# EAGLE board SunnyBuddy-Panel-v10 (EAGLE 6.5.0), part 1 of 2
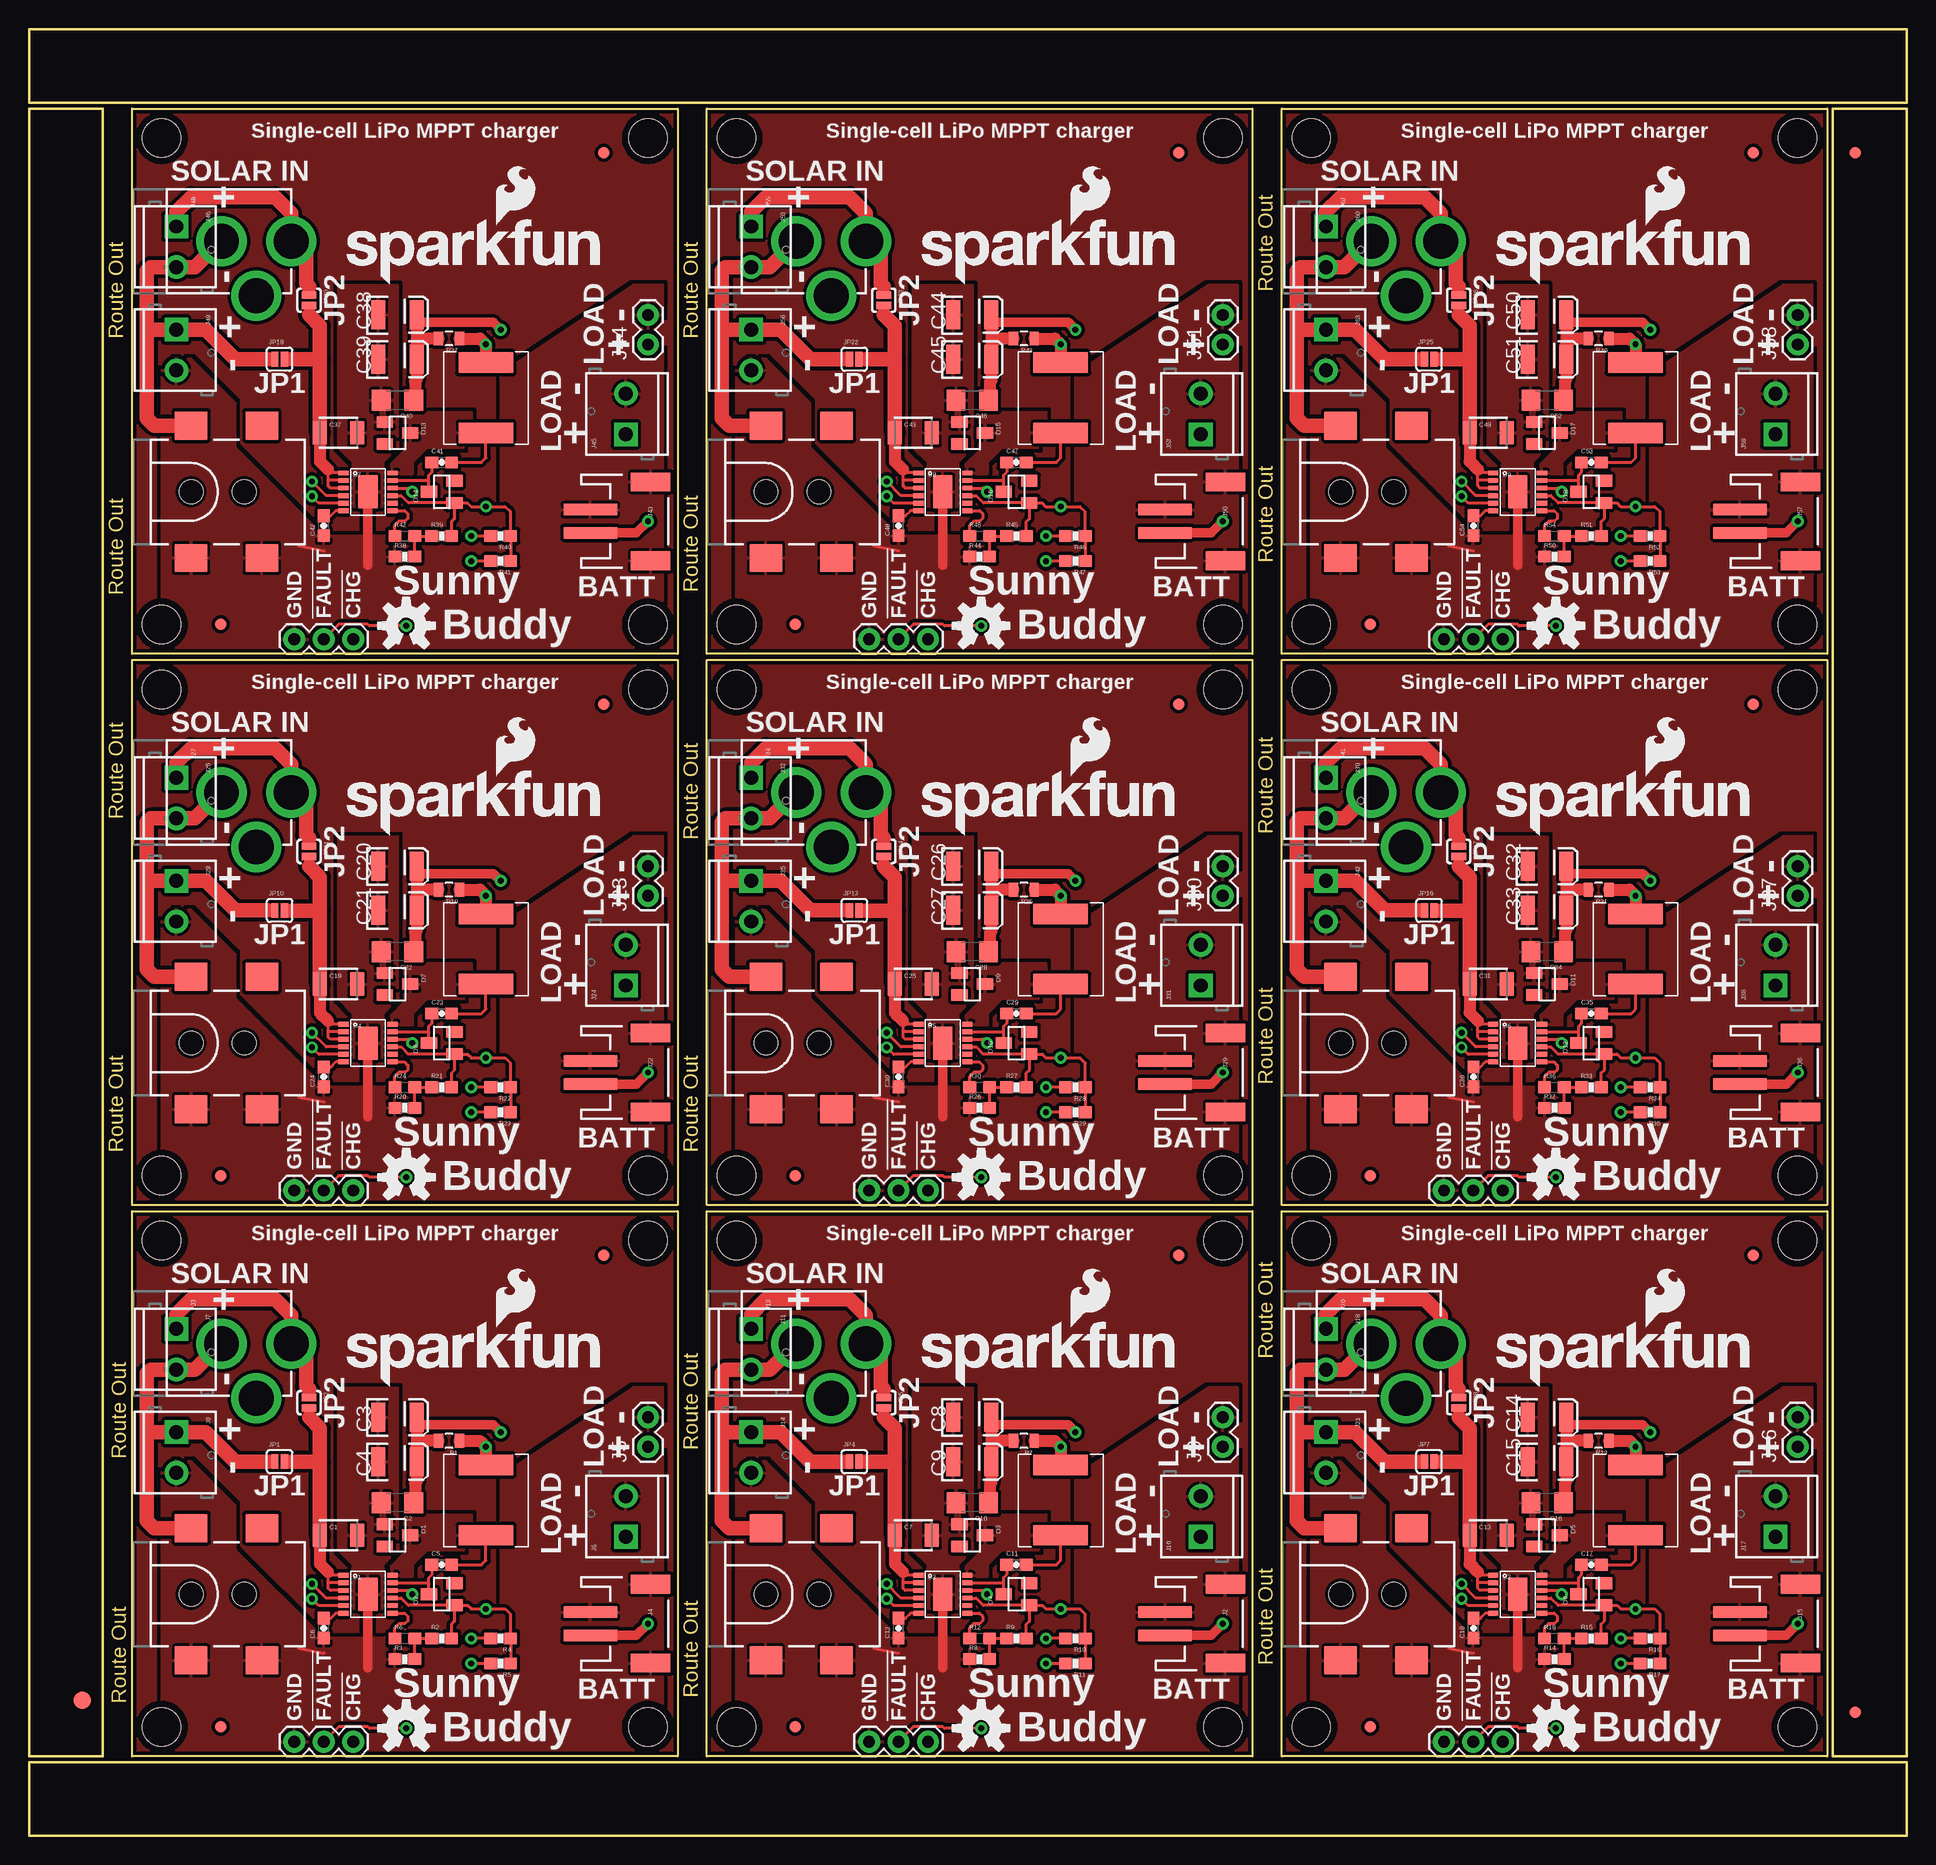
[diagram p0: board, top side]
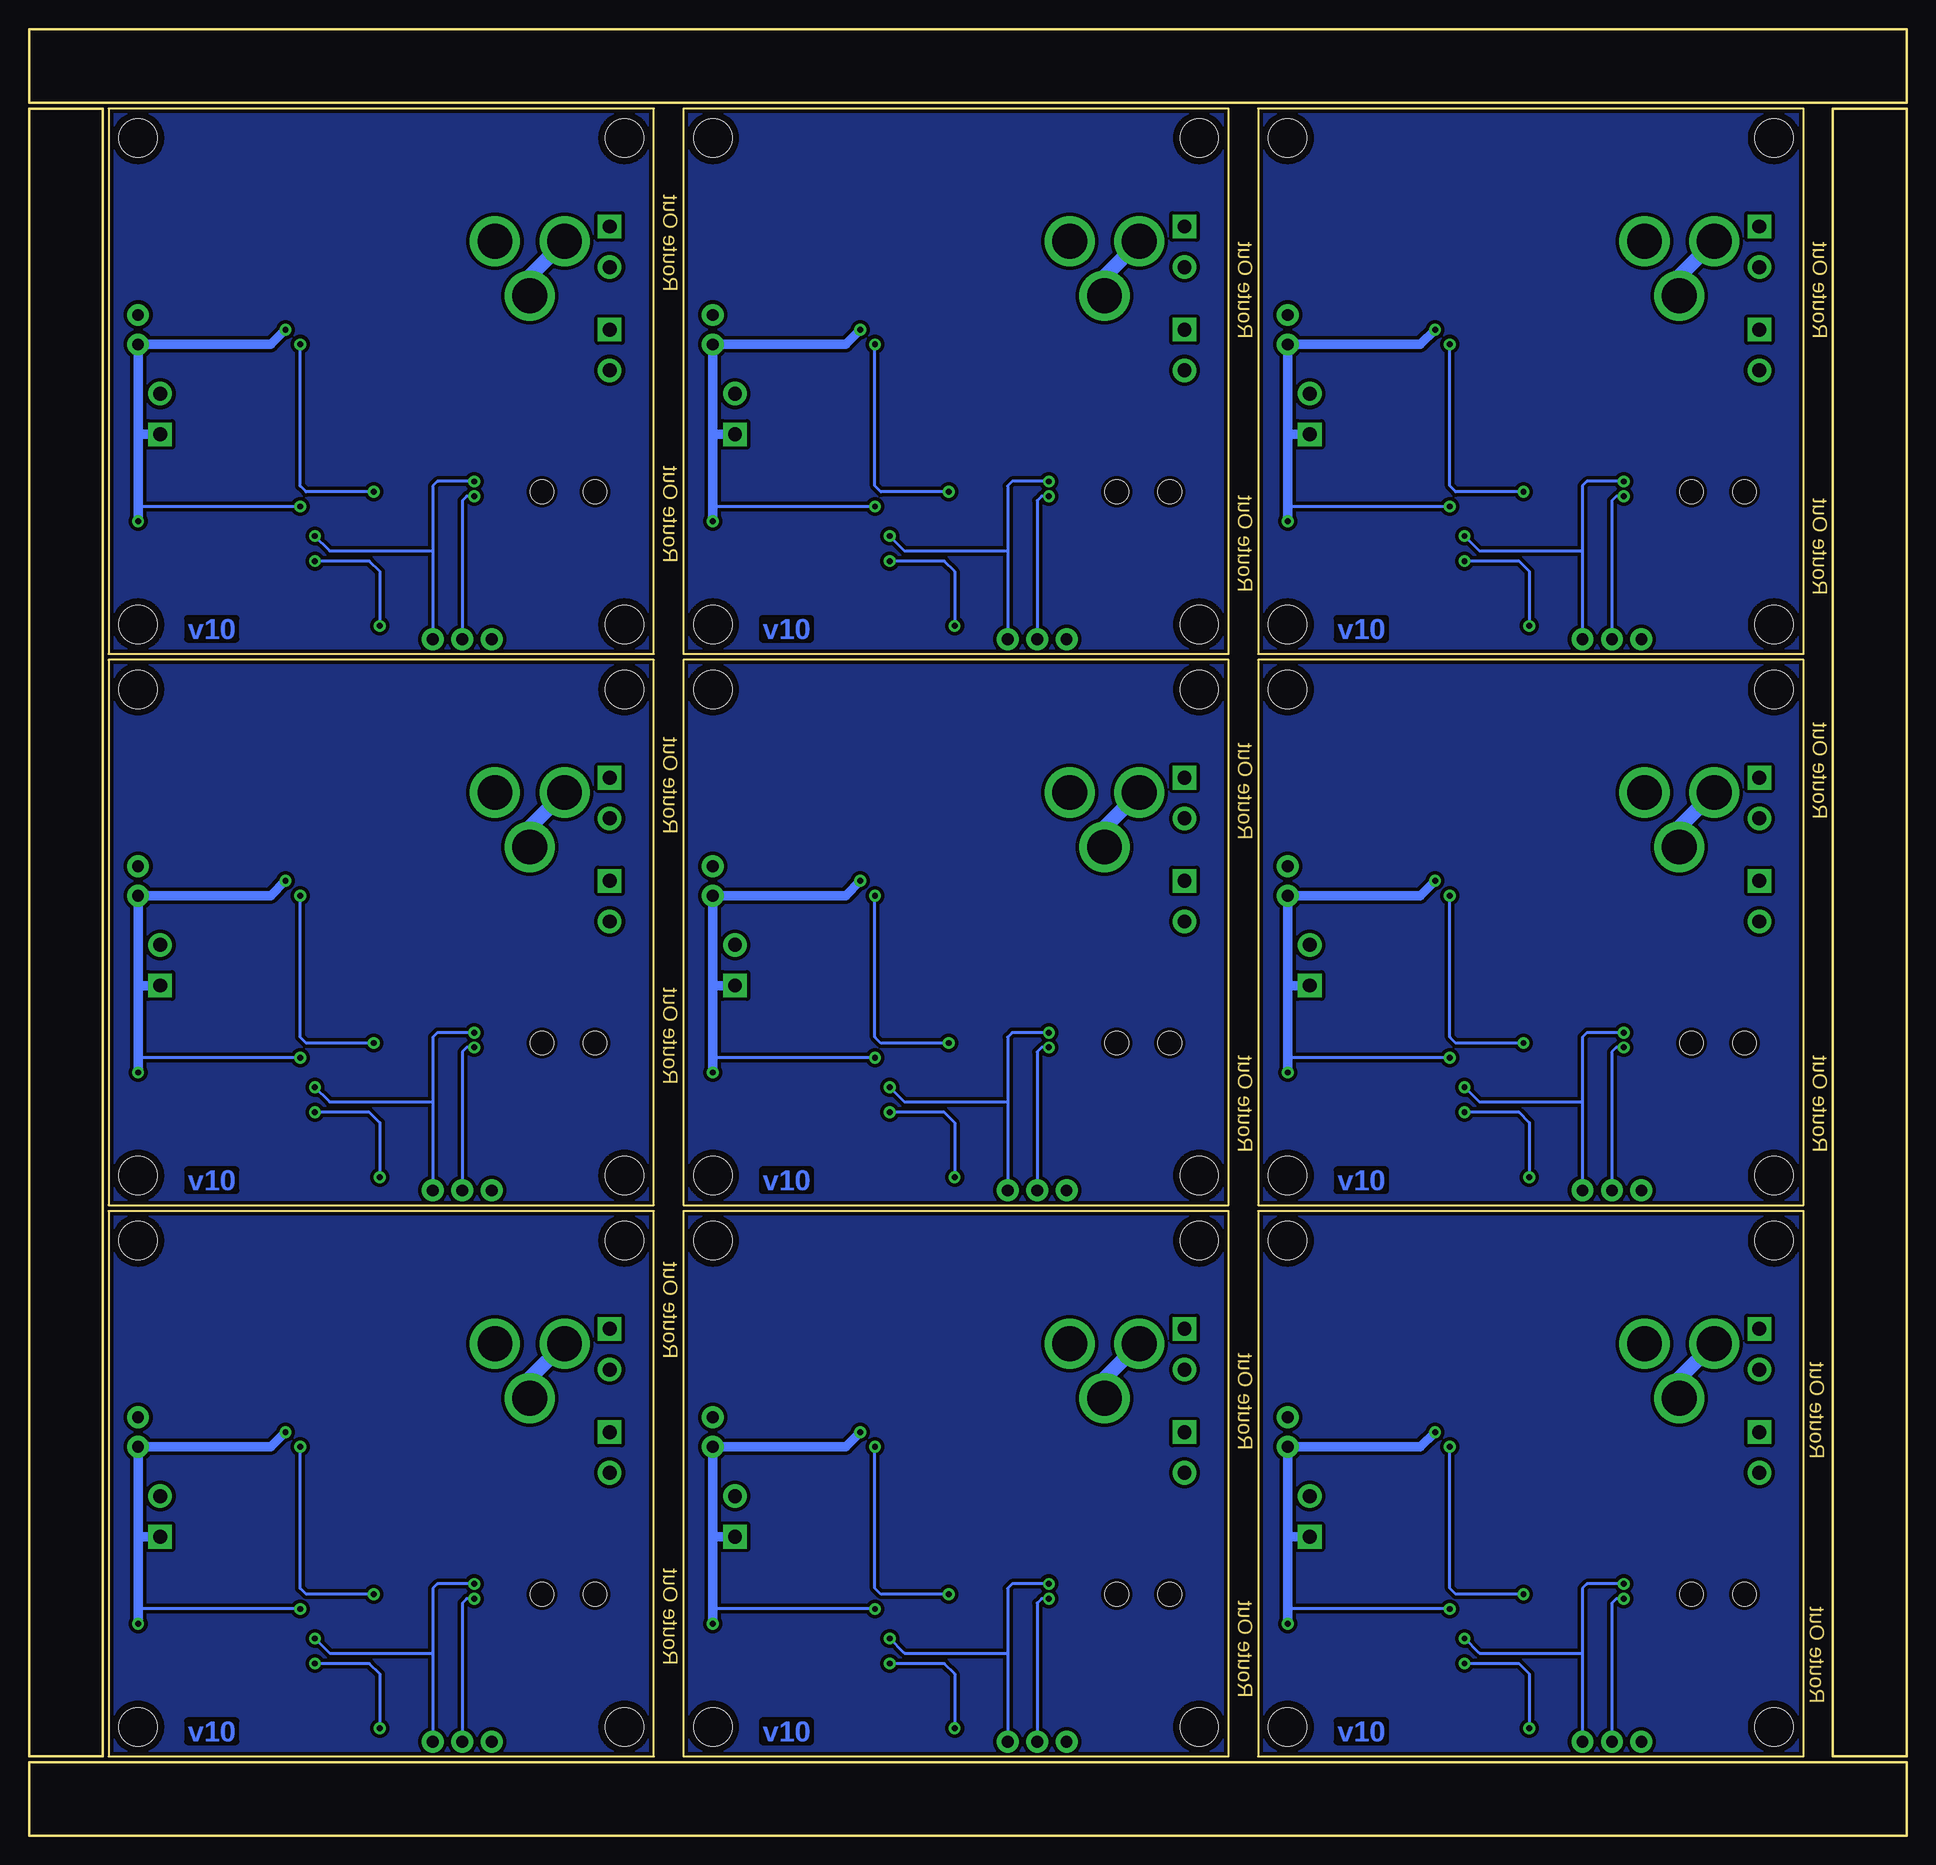
[diagram p1: board, bottom side, seen from below]

Size 161.8 x 155.7 mm. Coordinates in mm from the lower left corner, seen from the top.
Outline: 8.89,53.85 55.88,53.85 55.88,6.86 8.89,6.86 8.89,53.85
Outline: 58.42,53.85 105.41,53.85 105.41,6.86 58.42,6.86 58.42,53.85
Outline: 107.95,53.85 154.94,53.85 154.94,6.86 107.95,6.86 107.95,53.85
Outline: 8.89,101.35 55.88,101.35 55.88,54.36 8.89,54.36 8.89,101.35
Outline: 58.42,101.35 105.41,101.35 105.41,54.36 58.42,54.36 58.42,101.35
Outline: 107.95,101.35 154.94,101.35 154.94,54.36 107.95,54.36 107.95,101.35
Outline: 8.89,148.84 55.88,148.84 55.88,101.85 8.89,101.85 8.89,148.84
Outline: 58.42,148.84 105.41,148.84 105.41,101.85 58.42,101.85 58.42,148.84
Outline: 107.95,148.84 154.94,148.84 154.94,101.85 107.95,101.85 107.95,148.84
Outline: 6.35,6.86 6.35,148.84 0,148.84 0,6.86 6.35,6.86
Outline: 0,155.7 0,149.35 161.8,149.35 161.8,155.7 0,155.7
Outline: 155.45,148.84 155.45,6.86 161.8,6.86 161.8,148.84 155.45,148.84
Outline: 161.8,0 161.8,6.35 0,6.35 0,0 161.8,0
Copper layers (1*16): Top 0.035mm / dielectric 1.5mm / Bottom 0.035mm
Design rules "Sparkfun": minimum track width 8mil, minimum drill 20mil, track to track 8mil, track to pad 8mil, pad to pad 8mil, via to via 8mil, smd to smd 8mil, copper to edge 8mil, drill to drill 8mil, minimum pad ring 12mil, minimum via ring 10mil, stop-mask expansion 4mil, vias tented up to drill 20mil, thermal gap 10mil

## Footprints (pad centres in the part's own frame; a part is rotated, then mirrored left to right if it is on the bottom)
1210 = smd 1.2 x 2: 1 -1.6,0; 2 1.6,0
1206 = smd 1.6 x 1.8: 1 -1.4,0; 2 1.4,0
EIA3528 = smd 1.2 x 2.5: A 1.65,0; C -1.65,0
0603-CAP = smd 1.1 x 1: 1 -0.85,0; 2 0.85,0
SOT23 = smd 1 x 1.4: 1 -0.95,-1.1; 2 0.95,-1.1; 3 0,1.1
FIDUCIAL-1.5X3 = smd 1.5 x 1.5: 1 0,0
FIDUCIAL-1X2 = smd 1 x 1: 1 0,0
POWER_JACK_SMD = smd 2.8 x 2.4: GND 0,-5.7; P$4 6.1,-5.7; VIN0 0,5.7; VIN1 6.1,5.7 | hole 2.032: 0,0; 4.572,0
JST-2-SMD = smd 1 x 4.6: 1 -1,-3.7; 2 1,-3.7 | smd 1.6 x 3.4: NC1 -3.4,1.5; NC2 3.4,1.5
POWER_JACK_PTH = drill 2.997 pad 4.318: GND 0,7.7; GNDBREAK 4.7,10.7; PWR 0,13.7
1X02 = drill 1.016 pad 1.88: 1 0,0; 2 2.54,0
SCREWTERMINAL-3.5MM-2 = drill 1.2 pad 2.032 square: 1 0,0 | drill 1.2 pad 2.032: 2 3.5,0
SJ_2S = smd 0.635 x 1.27: 1 -0.412,0; 2 0.412,0
SJ_2S-NO = smd 0.635 x 1.27: 1 -0.45,0; 2 0.45,0
1X03 = drill 1.016 pad 1.88: 1 0,0; 2 2.54,0; 3 5.08,0
CR75 = smd 1.75 x 4.7: P$1 0,0; P$2 6.05,0
0805 = smd 0.8 x 1.2: 1 -0.9,0; 2 0.9,0
0603-RES = smd 1.1 x 1: 1 -0.85,0; 2 0.85,0
0603 = smd 1.1 x 1: 1 -0.85,0; 2 0.85,0
STAND-OFF = hole 3.302: 0,0
MSOP-12_GND = smd 0.889 x 0.42: 1 -2.1,1.625; 2 -2.1,0.975; 3 -2.1,0.325; 4 -2.1,-0.325; 5 -2.1,-0.975; 6 -2.1,-1.625; 7 2.1,-1.625; 8 2.1,-0.975; 9 2.1,-0.325; 10 2.1,0.325; 11 2.1,0.975; 12 2.1,1.625 | smd 1.651 x 2.845: 13 0,0

## Placement (x,y rotation side)
C1  10uF  [1210]  26.67,25.91 0 top
C2  10uF  [1206]  31.75,28.7 180 top
C3  47uF  [EIA3528]  31.75,36.07 0 top
C4  47uF  [EIA3528]  31.75,32.26 0 top
C5  1.0uF  [0603-CAP]  35.56,23.37 0 top
C6  1.0uF  [0603-CAP]  25.4,17.91 90 top
C7  10uF  [1210]  76.2,25.91 0 top
C8  47uF  [EIA3528]  81.28,36.07 0 top
C9  47uF  [EIA3528]  81.28,32.26 0 top
C10  10uF  [1206]  81.28,28.7 180 top
C11  1.0uF  [0603-CAP]  85.09,23.37 0 top
C12  1.0uF  [0603-CAP]  74.93,17.91 90 top
C13  10uF  [1210]  125.73,25.91 0 top
C14  47uF  [EIA3528]  130.81,36.07 0 top
C15  47uF  [EIA3528]  130.81,32.26 0 top
C16  10uF  [1206]  130.81,28.7 180 top
C17  1.0uF  [0603-CAP]  134.62,23.37 0 top
C18  1.0uF  [0603-CAP]  124.46,17.91 90 top
C19  10uF  [1210]  26.67,73.41 0 top
C20  47uF  [EIA3528]  31.75,83.57 0 top
C21  47uF  [EIA3528]  31.75,79.76 0 top
C22  10uF  [1206]  31.75,76.2 180 top
C23  1.0uF  [0603-CAP]  35.56,70.87 0 top
C24  1.0uF  [0603-CAP]  25.4,65.41 90 top
C25  10uF  [1210]  76.2,73.41 0 top
C26  47uF  [EIA3528]  81.28,83.57 0 top
C27  47uF  [EIA3528]  81.28,79.76 0 top
C28  10uF  [1206]  81.28,76.2 180 top
C29  1.0uF  [0603-CAP]  85.09,70.87 0 top
C30  1.0uF  [0603-CAP]  74.93,65.41 90 top
C31  10uF  [1210]  125.73,73.41 0 top
C32  47uF  [EIA3528]  130.81,83.57 0 top
C33  47uF  [EIA3528]  130.81,79.76 0 top
C34  10uF  [1206]  130.81,76.2 180 top
C35  1.0uF  [0603-CAP]  134.62,70.87 0 top
C36  1.0uF  [0603-CAP]  124.46,65.41 90 top
C37  10uF  [1210]  26.67,120.9 0 top
C38  47uF  [EIA3528]  31.75,131.06 0 top
C39  47uF  [EIA3528]  31.75,127.25 0 top
C40  10uF  [1206]  31.75,123.7 180 top
C41  1.0uF  [0603-CAP]  35.56,118.36 0 top
C42  1.0uF  [0603-CAP]  25.4,112.9 90 top
C43  10uF  [1210]  76.2,120.9 0 top
C44  47uF  [EIA3528]  81.28,131.06 0 top
C45  47uF  [EIA3528]  81.28,127.25 0 top
C46  10uF  [1206]  81.28,123.7 180 top
C47  1.0uF  [0603-CAP]  85.09,118.36 0 top
C48  1.0uF  [0603-CAP]  74.93,112.9 90 top
C49  10uF  [1210]  125.73,120.9 0 top
C50  47uF  [EIA3528]  130.81,131.06 0 top
C51  47uF  [EIA3528]  130.81,127.25 0 top
C52  10uF  [1206]  130.81,123.7 180 top
C53  1.0uF  [0603-CAP]  134.62,118.36 0 top
C54  1.0uF  [0603-CAP]  124.46,112.9 90 top
D1  ZLLS500  [SOT23]  31.75,25.91 270 top
D2  ZLLS500  [SOT23]  35.56,20.83 90 top
D3  ZLLS500  [SOT23]  81.28,25.91 270 top
D4  ZLLS500  [SOT23]  85.09,20.83 90 top
D5  ZLLS500  [SOT23]  130.81,25.91 270 top
D6  ZLLS500  [SOT23]  134.62,20.83 90 top
D7  ZLLS500  [SOT23]  31.75,73.41 270 top
D8  ZLLS500  [SOT23]  35.56,68.33 90 top
D9  ZLLS500  [SOT23]  81.28,73.41 270 top
D10  ZLLS500  [SOT23]  85.09,68.33 90 top
D11  ZLLS500  [SOT23]  130.81,73.41 270 top
D12  ZLLS500  [SOT23]  134.62,68.33 90 top
D13  ZLLS500  [SOT23]  31.75,120.9 270 top
D14  ZLLS500  [SOT23]  35.56,115.82 90 top
D15  ZLLS500  [SOT23]  81.28,120.9 270 top
D16  ZLLS500  [SOT23]  85.09,115.82 90 top
D17  ZLLS500  [SOT23]  130.81,120.9 270 top
D18  ZLLS500  [SOT23]  134.62,115.82 90 top
E$1  [FIDUCIAL-1.5X3]  4.57,11.68 0 top
E$5  [FIDUCIAL-1X2]  157.35,145.03 180 top
E$7  [FIDUCIAL-1X2]  157.35,10.67 0 top
FID1  FIDUCIAL1X2  [FIDUCIAL-1X2]  16.51,9.4 0 top
FID2  FIDUCIAL1X2  [FIDUCIAL-1X2]  49.53,50.04 0 top
FID3  FIDUCIAL1X2  [FIDUCIAL-1X2]  66.04,9.4 0 top
FID4  FIDUCIAL1X2  [FIDUCIAL-1X2]  99.06,50.04 0 top
FID5  FIDUCIAL1X2  [FIDUCIAL-1X2]  115.57,9.4 0 top
FID6  FIDUCIAL1X2  [FIDUCIAL-1X2]  148.59,50.04 0 top
FID7  FIDUCIAL1X2  [FIDUCIAL-1X2]  16.51,56.9 0 top
FID8  FIDUCIAL1X2  [FIDUCIAL-1X2]  49.53,97.54 0 top
FID9  FIDUCIAL1X2  [FIDUCIAL-1X2]  66.04,56.9 0 top
FID10  FIDUCIAL1X2  [FIDUCIAL-1X2]  99.06,97.54 0 top
FID11  FIDUCIAL1X2  [FIDUCIAL-1X2]  115.57,56.9 0 top
FID12  FIDUCIAL1X2  [FIDUCIAL-1X2]  148.59,97.54 0 top
FID13  FIDUCIAL1X2  [FIDUCIAL-1X2]  16.51,104.39 0 top
FID14  FIDUCIAL1X2  [FIDUCIAL-1X2]  49.53,145.03 0 top
FID15  FIDUCIAL1X2  [FIDUCIAL-1X2]  66.04,104.39 0 top
FID16  FIDUCIAL1X2  [FIDUCIAL-1X2]  99.06,145.03 0 top
FID17  FIDUCIAL1X2  [FIDUCIAL-1X2]  115.57,104.39 0 top
FID18  FIDUCIAL1X2  [FIDUCIAL-1X2]  148.59,145.03 0 top
J1  5.5x2.1mm Barrel  [POWER_JACK_SMD]  13.97,20.83 0 top
J2  [JST-2-SMD]  101.6,18.29 270 top
J3  POWER_JACKPTH  [POWER_JACK_PTH]  8.89,42.42 270 top
J4  [JST-2-SMD]  52.07,18.29 270 top
J5  M02PTH  [1X02]  53.34,33.53 90 top
J6  M023.5MM  [SCREWTERMINAL-3.5MM-2]  51.44,25.78 90 top
J7  M023.5MM  [SCREWTERMINAL-3.5MM-2]  12.7,43.69 270 top
J8  M023.5MM  [SCREWTERMINAL-3.5MM-2]  12.7,34.8 270 top
J9  M02PTH  [1X02]  102.87,33.53 90 top
J10  M023.5MM  [SCREWTERMINAL-3.5MM-2]  100.97,25.78 90 top
J11  M023.5MM  [SCREWTERMINAL-3.5MM-2]  62.23,43.69 270 top
J12  5.5x2.1mm Barrel  [POWER_JACK_SMD]  63.5,20.83 0 top
J13  POWER_JACKPTH  [POWER_JACK_PTH]  58.42,42.42 270 top
J14  M023.5MM  [SCREWTERMINAL-3.5MM-2]  62.23,34.8 270 top
J15  [JST-2-SMD]  151.13,18.29 270 top
J16  M02PTH  [1X02]  152.4,33.53 90 top
J17  M023.5MM  [SCREWTERMINAL-3.5MM-2]  150.5,25.78 90 top
J18  M023.5MM  [SCREWTERMINAL-3.5MM-2]  111.76,43.69 270 top
J19  5.5x2.1mm Barrel  [POWER_JACK_SMD]  113.03,20.83 0 top
J20  POWER_JACKPTH  [POWER_JACK_PTH]  107.95,42.42 270 top
J21  M023.5MM  [SCREWTERMINAL-3.5MM-2]  111.76,34.8 270 top
J22  [JST-2-SMD]  52.07,65.79 270 top
J23  M02PTH  [1X02]  53.34,81.03 90 top
J24  M023.5MM  [SCREWTERMINAL-3.5MM-2]  51.44,73.28 90 top
J25  M023.5MM  [SCREWTERMINAL-3.5MM-2]  12.7,91.19 270 top
J26  5.5x2.1mm Barrel  [POWER_JACK_SMD]  13.97,68.33 0 top
J27  POWER_JACKPTH  [POWER_JACK_PTH]  8.89,89.92 270 top
J28  M023.5MM  [SCREWTERMINAL-3.5MM-2]  12.7,82.3 270 top
J29  [JST-2-SMD]  101.6,65.79 270 top
J30  M02PTH  [1X02]  102.87,81.03 90 top
J31  M023.5MM  [SCREWTERMINAL-3.5MM-2]  100.97,73.28 90 top
J32  M023.5MM  [SCREWTERMINAL-3.5MM-2]  62.23,91.19 270 top
J33  5.5x2.1mm Barrel  [POWER_JACK_SMD]  63.5,68.33 0 top
J34  POWER_JACKPTH  [POWER_JACK_PTH]  58.42,89.92 270 top
J35  M023.5MM  [SCREWTERMINAL-3.5MM-2]  62.23,82.3 270 top
J36  [JST-2-SMD]  151.13,65.79 270 top
J37  M02PTH  [1X02]  152.4,81.03 90 top
J38  M023.5MM  [SCREWTERMINAL-3.5MM-2]  150.5,73.28 90 top
J39  M023.5MM  [SCREWTERMINAL-3.5MM-2]  111.76,91.19 270 top
J40  5.5x2.1mm Barrel  [POWER_JACK_SMD]  113.03,68.33 0 top
J41  POWER_JACKPTH  [POWER_JACK_PTH]  107.95,89.92 270 top
J42  M023.5MM  [SCREWTERMINAL-3.5MM-2]  111.76,82.3 270 top
J43  [JST-2-SMD]  52.07,113.28 270 top
J44  M02PTH  [1X02]  53.34,128.52 90 top
J45  M023.5MM  [SCREWTERMINAL-3.5MM-2]  51.44,120.78 90 top
J46  M023.5MM  [SCREWTERMINAL-3.5MM-2]  12.7,138.68 270 top
J47  5.5x2.1mm Barrel  [POWER_JACK_SMD]  13.97,115.82 0 top
J48  POWER_JACKPTH  [POWER_JACK_PTH]  8.89,137.41 270 top
J49  M023.5MM  [SCREWTERMINAL-3.5MM-2]  12.7,129.79 270 top
J50  [JST-2-SMD]  101.6,113.28 270 top
J51  M02PTH  [1X02]  102.87,128.52 90 top
J52  M023.5MM  [SCREWTERMINAL-3.5MM-2]  100.97,120.78 90 top
J53  M023.5MM  [SCREWTERMINAL-3.5MM-2]  62.23,138.68 270 top
J54  5.5x2.1mm Barrel  [POWER_JACK_SMD]  63.5,115.82 0 top
J55  POWER_JACKPTH  [POWER_JACK_PTH]  58.42,137.41 270 top
J56  M023.5MM  [SCREWTERMINAL-3.5MM-2]  62.23,129.79 270 top
J57  [JST-2-SMD]  151.13,113.28 270 top
J58  M02PTH  [1X02]  152.4,128.52 90 top
J59  M023.5MM  [SCREWTERMINAL-3.5MM-2]  150.5,120.78 90 top
J60  M023.5MM  [SCREWTERMINAL-3.5MM-2]  111.76,138.68 270 top
J61  5.5x2.1mm Barrel  [POWER_JACK_SMD]  113.03,115.82 0 top
J62  POWER_JACKPTH  [POWER_JACK_PTH]  107.95,137.41 270 top
J63  M023.5MM  [SCREWTERMINAL-3.5MM-2]  111.76,129.79 270 top
JP1  [SJ_2S]  21.59,32.26 0 top
JP2  [SJ_2S-NO]  24.13,37.34 270 top
JP3  [1X03]  27.94,8.13 180 top
JP4  [SJ_2S]  71.12,32.26 0 top
JP5  [SJ_2S-NO]  73.66,37.34 270 top
JP6  [1X03]  77.47,8.13 180 top
JP7  [SJ_2S]  120.65,32.26 0 top
JP8  [SJ_2S-NO]  123.19,37.34 270 top
JP9  [1X03]  127,8.13 180 top
JP10  [SJ_2S]  21.59,79.76 0 top
JP11  [SJ_2S-NO]  24.13,84.84 270 top
JP12  [1X03]  27.94,55.63 180 top
JP13  [SJ_2S]  71.12,79.76 0 top
JP14  [SJ_2S-NO]  73.66,84.84 270 top
JP15  [1X03]  77.47,55.63 180 top
JP16  [SJ_2S]  120.65,79.76 0 top
JP17  [SJ_2S-NO]  123.19,84.84 270 top
JP18  [1X03]  127,55.63 180 top
JP19  [SJ_2S]  21.59,127.25 0 top
JP20  [SJ_2S-NO]  24.13,132.33 270 top
JP21  [1X03]  27.94,103.12 180 top
JP22  [SJ_2S]  71.12,127.25 0 top
JP23  [SJ_2S-NO]  73.66,132.33 270 top
JP24  [1X03]  77.47,103.12 180 top
JP25  [SJ_2S]  120.65,127.25 0 top
JP26  [SJ_2S-NO]  123.19,132.33 270 top
JP27  [1X03]  127,103.12 180 top
L1  68uH  [CR75]  39.37,25.91 90 top
L2  68uH  [CR75]  88.9,25.91 90 top
L3  68uH  [CR75]  138.43,25.91 90 top
L4  68uH  [CR75]  39.37,73.41 90 top
L5  68uH  [CR75]  88.9,73.41 90 top
L6  68uH  [CR75]  138.43,73.41 90 top
L7  68uH  [CR75]  39.37,120.9 90 top
L8  68uH  [CR75]  88.9,120.9 90 top
L9  68uH  [CR75]  138.43,120.9 90 top
LOGO1  SFE_LOGO_NAME_FLAME.2_INCH  [SFE_LOGO_NAME_FLAME_.2]  26.67,38.61 0 top
LOGO2  OSHW-LOGOM  [OSHW-LOGO-M]  32.51,9.27 0 top
LOGO3  SFE_LOGO_NAME_FLAME.2_INCH  [SFE_LOGO_NAME_FLAME_.2]  76.2,38.61 0 top
LOGO4  OSHW-LOGOM  [OSHW-LOGO-M]  82.04,9.27 0 top
LOGO5  SFE_LOGO_NAME_FLAME.2_INCH  [SFE_LOGO_NAME_FLAME_.2]  125.73,38.61 0 top
LOGO6  OSHW-LOGOM  [OSHW-LOGO-M]  131.57,9.27 0 top
LOGO7  SFE_LOGO_NAME_FLAME.2_INCH  [SFE_LOGO_NAME_FLAME_.2]  26.67,86.11 0 top
LOGO8  OSHW-LOGOM  [OSHW-LOGO-M]  32.51,56.77 0 top
LOGO9  SFE_LOGO_NAME_FLAME.2_INCH  [SFE_LOGO_NAME_FLAME_.2]  76.2,86.11 0 top
LOGO10  OSHW-LOGOM  [OSHW-LOGO-M]  82.04,56.77 0 top
LOGO11  SFE_LOGO_NAME_FLAME.2_INCH  [SFE_LOGO_NAME_FLAME_.2]  125.73,86.11 0 top
LOGO12  OSHW-LOGOM  [OSHW-LOGO-M]  131.57,56.77 0 top
LOGO13  SFE_LOGO_NAME_FLAME.2_INCH  [SFE_LOGO_NAME_FLAME_.2]  26.67,133.6 0 top
LOGO14  OSHW-LOGOM  [OSHW-LOGO-M]  32.51,104.27 0 top
LOGO15  SFE_LOGO_NAME_FLAME.2_INCH  [SFE_LOGO_NAME_FLAME_.2]  76.2,133.6 0 top
LOGO16  OSHW-LOGOM  [OSHW-LOGO-M]  82.04,104.27 0 top
LOGO17  SFE_LOGO_NAME_FLAME.2_INCH  [SFE_LOGO_NAME_FLAME_.2]  125.73,133.6 0 top
LOGO18  OSHW-LOGOM  [OSHW-LOGO-M]  131.57,104.27 0 top
R1  0.22  [0805]  36.2,34.04 180 top
R2  100k  [0603-RES]  35.56,17.02 0 top
R3  300k  [0603-RES]  32.38,15.24 0 top
R4  10K  [0603-RES]  40.64,17.02 180 top
R5  10K  [0603-RES]  40.64,14.86 180 top
R6  0  [0603]  32.38,17.02 0 top
R7  0.22  [0805]  85.72,34.04 180 top
R8  300k  [0603-RES]  81.92,15.24 0 top
R9  100k  [0603-RES]  85.09,17.02 0 top
R10  10K  [0603-RES]  90.17,17.02 180 top
R11  10K  [0603-RES]  90.17,14.86 180 top
R12  0  [0603]  81.92,17.02 0 top
R13  0.22  [0805]  135.25,34.04 180 top
R14  300k  [0603-RES]  131.44,15.24 0 top
R15  100k  [0603-RES]  134.62,17.02 0 top
R16  10K  [0603-RES]  139.7,17.02 180 top
R17  10K  [0603-RES]  139.7,14.86 180 top
R18  0  [0603]  131.44,17.02 0 top
R19  0.22  [0805]  36.2,81.53 180 top
R20  300k  [0603-RES]  32.38,62.74 0 top
R21  100k  [0603-RES]  35.56,64.52 0 top
R22  10K  [0603-RES]  40.64,64.52 180 top
R23  10K  [0603-RES]  40.64,62.36 180 top
R24  0  [0603]  32.38,64.52 0 top
R25  0.22  [0805]  85.72,81.53 180 top
R26  300k  [0603-RES]  81.92,62.74 0 top
R27  100k  [0603-RES]  85.09,64.52 0 top
R28  10K  [0603-RES]  90.17,64.52 180 top
R29  10K  [0603-RES]  90.17,62.36 180 top
R30  0  [0603]  81.92,64.52 0 top
R31  0.22  [0805]  135.25,81.53 180 top
R32  300k  [0603-RES]  131.44,62.74 0 top
R33  100k  [0603-RES]  134.62,64.52 0 top
R34  10K  [0603-RES]  139.7,64.52 180 top
R35  10K  [0603-RES]  139.7,62.36 180 top
R36  0  [0603]  131.44,64.52 0 top
R37  0.22  [0805]  36.2,129.03 180 top
R38  300k  [0603-RES]  32.38,110.24 0 top
R39  100k  [0603-RES]  35.56,112.01 0 top
R40  10K  [0603-RES]  40.64,112.01 180 top
R41  10K  [0603-RES]  40.64,109.86 180 top
R42  0  [0603]  32.38,112.01 0 top
R43  0.22  [0805]  85.72,129.03 180 top
R44  300k  [0603-RES]  81.92,110.24 0 top
R45  100k  [0603-RES]  85.09,112.01 0 top
R46  10K  [0603-RES]  90.17,112.01 180 top
R47  10K  [0603-RES]  90.17,109.86 180 top
R48  0  [0603]  81.92,112.01 0 top
R49  0.22  [0805]  135.25,129.03 180 top
R50  300k  [0603-RES]  131.44,110.24 0 top
R51  100k  [0603-RES]  134.62,112.01 0 top
R52  10K  [0603-RES]  139.7,112.01 180 top
R53  10K  [0603-RES]  139.7,109.86 180 top
R54  0  [0603]  131.44,112.01 0 top
STANDOFF1  STAND-OFF  [STAND-OFF]  11.43,9.4 0 top
STANDOFF2  STAND-OFF  [STAND-OFF]  11.43,51.31 0 top
STANDOFF3  STAND-OFF  [STAND-OFF]  53.34,51.31 0 top
STANDOFF4  STAND-OFF  [STAND-OFF]  53.34,9.4 0 top
STANDOFF5  STAND-OFF  [STAND-OFF]  60.96,9.4 0 top
STANDOFF6  STAND-OFF  [STAND-OFF]  60.96,51.31 0 top
STANDOFF7  STAND-OFF  [STAND-OFF]  102.87,51.31 0 top
STANDOFF8  STAND-OFF  [STAND-OFF]  102.87,9.4 0 top
STANDOFF9  STAND-OFF  [STAND-OFF]  110.49,9.4 0 top
STANDOFF10  STAND-OFF  [STAND-OFF]  110.49,51.31 0 top
STANDOFF11  STAND-OFF  [STAND-OFF]  152.4,51.31 0 top
STANDOFF12  STAND-OFF  [STAND-OFF]  152.4,9.4 0 top
STANDOFF13  STAND-OFF  [STAND-OFF]  11.43,56.9 0 top
STANDOFF14  STAND-OFF  [STAND-OFF]  11.43,98.81 0 top
STANDOFF15  STAND-OFF  [STAND-OFF]  53.34,98.81 0 top
STANDOFF16  STAND-OFF  [STAND-OFF]  53.34,56.9 0 top
STANDOFF17  STAND-OFF  [STAND-OFF]  60.96,56.9 0 top
STANDOFF18  STAND-OFF  [STAND-OFF]  60.96,98.81 0 top
STANDOFF19  STAND-OFF  [STAND-OFF]  102.87,98.81 0 top
STANDOFF20  STAND-OFF  [STAND-OFF]  102.87,56.9 0 top
STANDOFF21  STAND-OFF  [STAND-OFF]  110.49,56.9 0 top
STANDOFF22  STAND-OFF  [STAND-OFF]  110.49,98.81 0 top
STANDOFF23  STAND-OFF  [STAND-OFF]  152.4,98.81 0 top
STANDOFF24  STAND-OFF  [STAND-OFF]  152.4,56.9 0 top
STANDOFF25  STAND-OFF  [STAND-OFF]  11.43,104.39 0 top
STANDOFF26  STAND-OFF  [STAND-OFF]  11.43,146.3 0 top
STANDOFF27  STAND-OFF  [STAND-OFF]  53.34,146.3 0 top
STANDOFF28  STAND-OFF  [STAND-OFF]  53.34,104.39 0 top
STANDOFF29  STAND-OFF  [STAND-OFF]  60.96,104.39 0 top
STANDOFF30  STAND-OFF  [STAND-OFF]  60.96,146.3 0 top
STANDOFF31  STAND-OFF  [STAND-OFF]  102.87,146.3 0 top
STANDOFF32  STAND-OFF  [STAND-OFF]  102.87,104.39 0 top
STANDOFF33  STAND-OFF  [STAND-OFF]  110.49,104.39 0 top
STANDOFF34  STAND-OFF  [STAND-OFF]  110.49,146.3 0 top
STANDOFF35  STAND-OFF  [STAND-OFF]  152.4,146.3 0 top
STANDOFF36  STAND-OFF  [STAND-OFF]  152.4,104.39 0 top
U1  LT3652  [MSOP-12_GND]  29.21,20.83 0 top
U2  LT3652  [MSOP-12_GND]  78.74,20.83 0 top
U3  LT3652  [MSOP-12_GND]  128.27,20.83 0 top
U4  LT3652  [MSOP-12_GND]  29.21,68.33 0 top
U5  LT3652  [MSOP-12_GND]  78.74,68.33 0 top
U6  LT3652  [MSOP-12_GND]  128.27,68.33 0 top
U7  LT3652  [MSOP-12_GND]  29.21,115.82 0 top
U8  LT3652  [MSOP-12_GND]  78.74,115.82 0 top
U9  LT3652  [MSOP-12_GND]  128.27,115.82 0 top

## Library data of the parts
C1 C7 C13 C19 C25 C31 C37 C43 C49 = SparkFun-Capacitors; PROD_ID: CAP-09824
C2 C10 C16 C22 C28 C34 C40 C46 C52 = SparkFun-Capacitors; PROD_ID: CAP-10057
C3 C4 C8 C9 C14 C15 C20 C21 C26 C27 C32 C33 C38 C39 C44 C45 C50 C51 = SparkFun-Capacitors; PROD_ID: CAP-08310
C5 C6 C11 C12 C17 C18 C23 C24 C29 C30 C35 C36 C41 C42 C47 C48 C53 C54 = SparkFun-Capacitors; PROD_ID: CAP-00868
D1-D18 = SparkFun-DiscreteSemi; PROD_ID: DIO-08411
E$1 E$5 E$7 FID1-FID18 LOGO1-LOGO18 = SparkFun-Aesthetics
J1 J12 J19 J26 J33 J40 J47 J54 J61 = SparkFun-Connectors; PROD_ID: CONN-08106
J2 J4 J15 J22 J29 J36 J43 J50 J57 = SparkFun-Connectors; PROD_ID: CONN-08352
J3 J5-J11 J13 J14 J16-J18 J20 J21 J23-J25 J27 J28 J30-J32 J34 J35 J37-J39 J41 J42 J44-J46 J48 J49 J51-J53 J55 J56 J58-J60 J62 J63 JP3 JP6 JP9 JP12 JP15 JP18 JP21 JP24 JP27 = SparkFun-Connectors
JP1 JP2 JP4 JP5 JP7 JP8 JP10 JP11 JP13 JP14 JP16 JP17 JP19 JP20 JP22 JP23 JP25 JP26 = SparkFun-Passives
L1-L9 = SparkFun-Passives; PROD_ID: NDUC-09739
R1 R7 R13 R19 R25 R31 R37 R43 R49 = SparkFun-Resistors; PROD_ID: RES-09883
R2 R9 R15 R21 R27 R33 R39 R45 R51 = SparkFun-Resistors; PROD_ID: RES-07828
R3 R8 R14 R20 R26 R32 R38 R44 R50 = SparkFun-Resistors; PROD_ID: RES-10809
R4 R5 R10 R11 R16 R17 R22 R23 R28 R29 R34 R35 R40 R41 R46 R47 R52 R53 = SparkFun-Resistors; PROD_ID: RES-00824
R6 R12 R18 R24 R30 R36 R42 R48 R54 = SparkFun-Resistors; PROD_ID: RES-08609
STANDOFF1-STANDOFF36 = SparkFun-Electromechanical
U1-U9 = SparkFun-PowerIC

## Nets
!CHRG: JP3.1 R4.2 U1.4
!CHRG1: JP6.1 R10.2 U2.4
!CHRG2: JP9.1 R16.2 U3.4
!CHRG3: JP12.1 R22.2 U4.4
!CHRG4: JP15.1 R28.2 U5.4
!CHRG5: JP18.1 R34.2 U6.4
!CHRG6: JP21.1 R40.2 U7.4
!CHRG7: JP24.1 R46.2 U8.4
!CHRG8: JP27.1 R52.2 U9.4
!FAULT: JP3.2 R5.2 U1.5
!FAULT1: JP6.2 R11.2 U2.5
!FAULT2: JP9.2 R17.2 U3.5
!FAULT3: JP12.2 R23.2 U4.5
!FAULT4: JP15.2 R29.2 U5.5
!FAULT5: JP18.2 R35.2 U6.5
!FAULT6: JP21.2 R41.2 U7.5
!FAULT7: JP24.2 R47.2 U8.5
!FAULT8: JP27.2 R53.2 U9.5
BOOST: C5.1 D2.3 U1.11
BOOST1: C11.1 D4.3 U2.11
BOOST2: C17.1 D6.3 U3.11
BOOST3: C23.1 D8.3 U4.11
BOOST4: C29.1 D10.3 U5.11
BOOST5: C35.1 D12.3 U6.11
BOOST6: C41.1 D14.3 U7.11
BOOST7: C47.1 D16.3 U8.11
BOOST8: C53.1 D18.3 U9.11
FB: R2.1 R3.2 R6.2
FB1: R8.2 R9.1 R12.2
FB2: R14.2 R15.1 R18.2
FB3: R20.2 R21.1 R24.2
FB4: R26.2 R27.1 R30.2
FB5: R32.2 R33.1 R36.2
FB6: R38.2 R39.1 R42.2
FB7: R44.2 R45.1 R48.2
FB8: R50.2 R51.1 R54.2
GND: C1.2 C2.2 C3.C C4.C C6.1 D1.1 J1.GND J1.P$4 J4.1 J4.NC1 J4.NC2 J5.2 J6.2 J8.2 JP3.3 R3.1 U1.13
GND1: C7.2 C8.C C9.C C10.2 C12.1 D3.1 J2.1 J2.NC1 J2.NC2 J9.2 J10.2 J12.GND J12.P$4 J14.2 JP6.3 R8.1 U2.13
GND2: C13.2 C14.C C15.C C16.2 C18.1 D5.1 J15.1 J15.NC1 J15.NC2 J16.2 J17.2 J19.GND J19.P$4 J21.2 JP9.3 R14.1 U3.13
GND3: C19.2 C20.C C21.C C22.2 C24.1 D7.1 J22.1 J22.NC1 J22.NC2 J23.2 J24.2 J26.GND J26.P$4 J28.2 JP12.3 R20.1 U4.13
GND4: C25.2 C26.C C27.C C28.2 C30.1 D9.1 J29.1 J29.NC1 J29.NC2 J30.2 J31.2 J33.GND J33.P$4 J35.2 JP15.3 R26.1 U5.13
GND5: C31.2 C32.C C33.C C34.2 C36.1 D11.1 J36.1 J36.NC1 J36.NC2 J37.2 J38.2 J40.GND J40.P$4 J42.2 JP18.3 R32.1 U6.13
GND6: C37.2 C38.C C39.C C40.2 C42.1 D13.1 J43.1 J43.NC1 J43.NC2 J44.2 J45.2 J47.GND J47.P$4 J49.2 JP21.3 R38.1 U7.13
GND7: C43.2 C44.C C45.C C46.2 C48.1 D15.1 J50.1 J50.NC1 J50.NC2 J51.2 J52.2 J54.GND J54.P$4 J56.2 JP24.3 R44.1 U8.13
GND8: C49.2 C50.C C51.C C52.2 C54.1 D17.1 J57.1 J57.NC1 J57.NC2 J58.2 J59.2 J61.GND J61.P$4 J63.2 JP27.3 R50.1 U9.13
N$3: R6.1 U1.7
N$4: J11.2 J12.VIN0 J13.GND J13.GNDBREAK J14.1 JP4.1
N$7: R12.1 U2.7
N$8: J1.VIN0 J3.GND J3.GNDBREAK J7.2 J8.1 JP1.1
N$9: J18.2 J19.VIN0 J20.GND J20.GNDBREAK J21.1 JP7.1
N$12: R18.1 U3.7
N$13: J25.2 J26.VIN0 J27.GND J27.GNDBREAK J28.1 JP10.1
N$16: R24.1 U4.7
N$17: J32.2 J33.VIN0 J34.GND J34.GNDBREAK J35.1 JP13.1
N$20: R30.1 U5.7
N$21: J39.2 J40.VIN0 J41.GND J41.GNDBREAK J42.1 JP16.1
N$24: R36.1 U6.7
N$25: J46.2 J47.VIN0 J48.GND J48.GNDBREAK J49.1 JP19.1
N$28: R42.1 U7.7
N$29: J53.2 J54.VIN0 J55.GND J55.GNDBREAK J56.1 JP22.1
N$32: R48.1 U8.7
N$33: J60.2 J61.VIN0 J62.GND J62.GNDBREAK J63.1 JP25.1
N$36: R54.1 U9.7
NTC: U1.8
NTC1: U2.8
NTC2: U3.8
NTC3: U4.8
NTC4: U5.8
NTC5: U6.8
NTC6: U7.8
NTC7: U8.8
NTC8: U9.8
SENSE: L1.P$2 R1.1 U1.10
SENSE1: L2.P$2 R7.1 U2.10
SENSE2: L3.P$2 R13.1 U3.10
SENSE3: L4.P$2 R19.1 U4.10
SENSE4: L5.P$2 R25.1 U5.10
SENSE5: L6.P$2 R31.1 U6.10
SENSE6: L7.P$2 R37.1 U7.10
SENSE7: L8.P$2 R43.1 U8.10
SENSE8: L9.P$2 R49.1 U9.10
SFSASDF: J3.PWR J7.1 JP2.1
SFSASDF1: J11.1 J13.PWR JP5.1
SFSASDF2: J18.1 J20.PWR JP8.1
SFSASDF3: J25.1 J27.PWR JP11.1
SFSASDF4: J32.1 J34.PWR JP14.1
SFSASDF5: J39.1 J41.PWR JP17.1
SFSASDF6: J46.1 J48.PWR JP20.1
SFSASDF7: J53.1 J55.PWR JP23.1
SFSASDF8: J60.1 J62.PWR JP26.1
SW: C5.2 D1.3 L1.P$1 U1.12
SW1: C11.2 D3.3 L2.P$1 U2.12
SW2: C17.2 D5.3 L3.P$1 U3.12
SW3: C23.2 D7.3 L4.P$1 U4.12
SW4: C29.2 D9.3 L5.P$1 U5.12
SW5: C35.2 D11.3 L6.P$1 U6.12
SW6: C41.2 D13.3 L7.P$1 U7.12
SW7: C47.2 D15.3 L8.P$1 U8.12
SW8: C53.2 D17.3 L9.P$1 U9.12
TIMER: C6.2 U1.6
TIMER1: C12.2 U2.6
TIMER2: C18.2 U3.6
TIMER3: C24.2 U4.6
TIMER4: C30.2 U5.6
TIMER5: C36.2 U6.6
TIMER6: C42.2 U7.6
TIMER7: C48.2 U8.6
TIMER8: C54.2 U9.6
V_BATT: C2.1 C3.A C4.A D2.1 J4.2 J5.1 J6.1 R1.2 R2.2 R4.1 R5.1 U1.9
V_BATT1: C8.A C9.A C10.1 D4.1 J2.2 J9.1 J10.1 R7.2 R9.2 R10.1 R11.1 U2.9
V_BATT2: C14.A C15.A C16.1 D6.1 J15.2 J16.1 J17.1 R13.2 R15.2 R16.1 R17.1 U3.9
V_BATT3: C20.A C21.A C22.1 D8.1 J22.2 J23.1 J24.1 R19.2 R21.2 R22.1 R23.1 U4.9
V_BATT4: C26.A C27.A C28.1 D10.1 J29.2 J30.1 J31.1 R25.2 R27.2 R28.1 R29.1 U5.9
V_BATT5: C32.A C33.A C34.1 D12.1 J36.2 J37.1 J38.1 R31.2 R33.2 R34.1 R35.1 U6.9
V_BATT6: C38.A C39.A C40.1 D14.1 J43.2 J44.1 J45.1 R37.2 R39.2 R40.1 R41.1 U7.9
V_BATT7: C44.A C45.A C46.1 D16.1 J50.2 J51.1 J52.1 R43.2 R45.2 R46.1 R47.1 U8.9
V_BATT8: C50.A C51.A C52.1 D18.1 J57.2 J58.1 J59.1 R49.2 R51.2 R52.1 R53.1 U9.9
VIN: C1.1 JP1.2 JP2.2 U1.1 U1.2 U1.3
VIN1: C7.1 JP4.2 JP5.2 U2.1 U2.2 U2.3
VIN2: C13.1 JP7.2 JP8.2 U3.1 U3.2 U3.3
VIN3: C19.1 JP10.2 JP11.2 U4.1 U4.2 U4.3
VIN4: C25.1 JP13.2 JP14.2 U5.1 U5.2 U5.3
VIN5: C31.1 JP16.2 JP17.2 U6.1 U6.2 U6.3
VIN6: C37.1 JP19.2 JP20.2 U7.1 U7.2 U7.3
VIN7: C43.1 JP22.2 JP23.2 U8.1 U8.2 U8.3
VIN8: C49.1 JP25.2 JP26.2 U9.1 U9.2 U9.3